# Altium PCB STM32WL_FE.PcbDoc
Units mm, origin at the board's own origin, x right, y up, seen from the top; angles counter-clockwise.
Board outline 90 x 80 mm, 2 copper layers (Top Layer, Bottom Layer); 62 components, 35 nets, 213 pads, 17 vias.
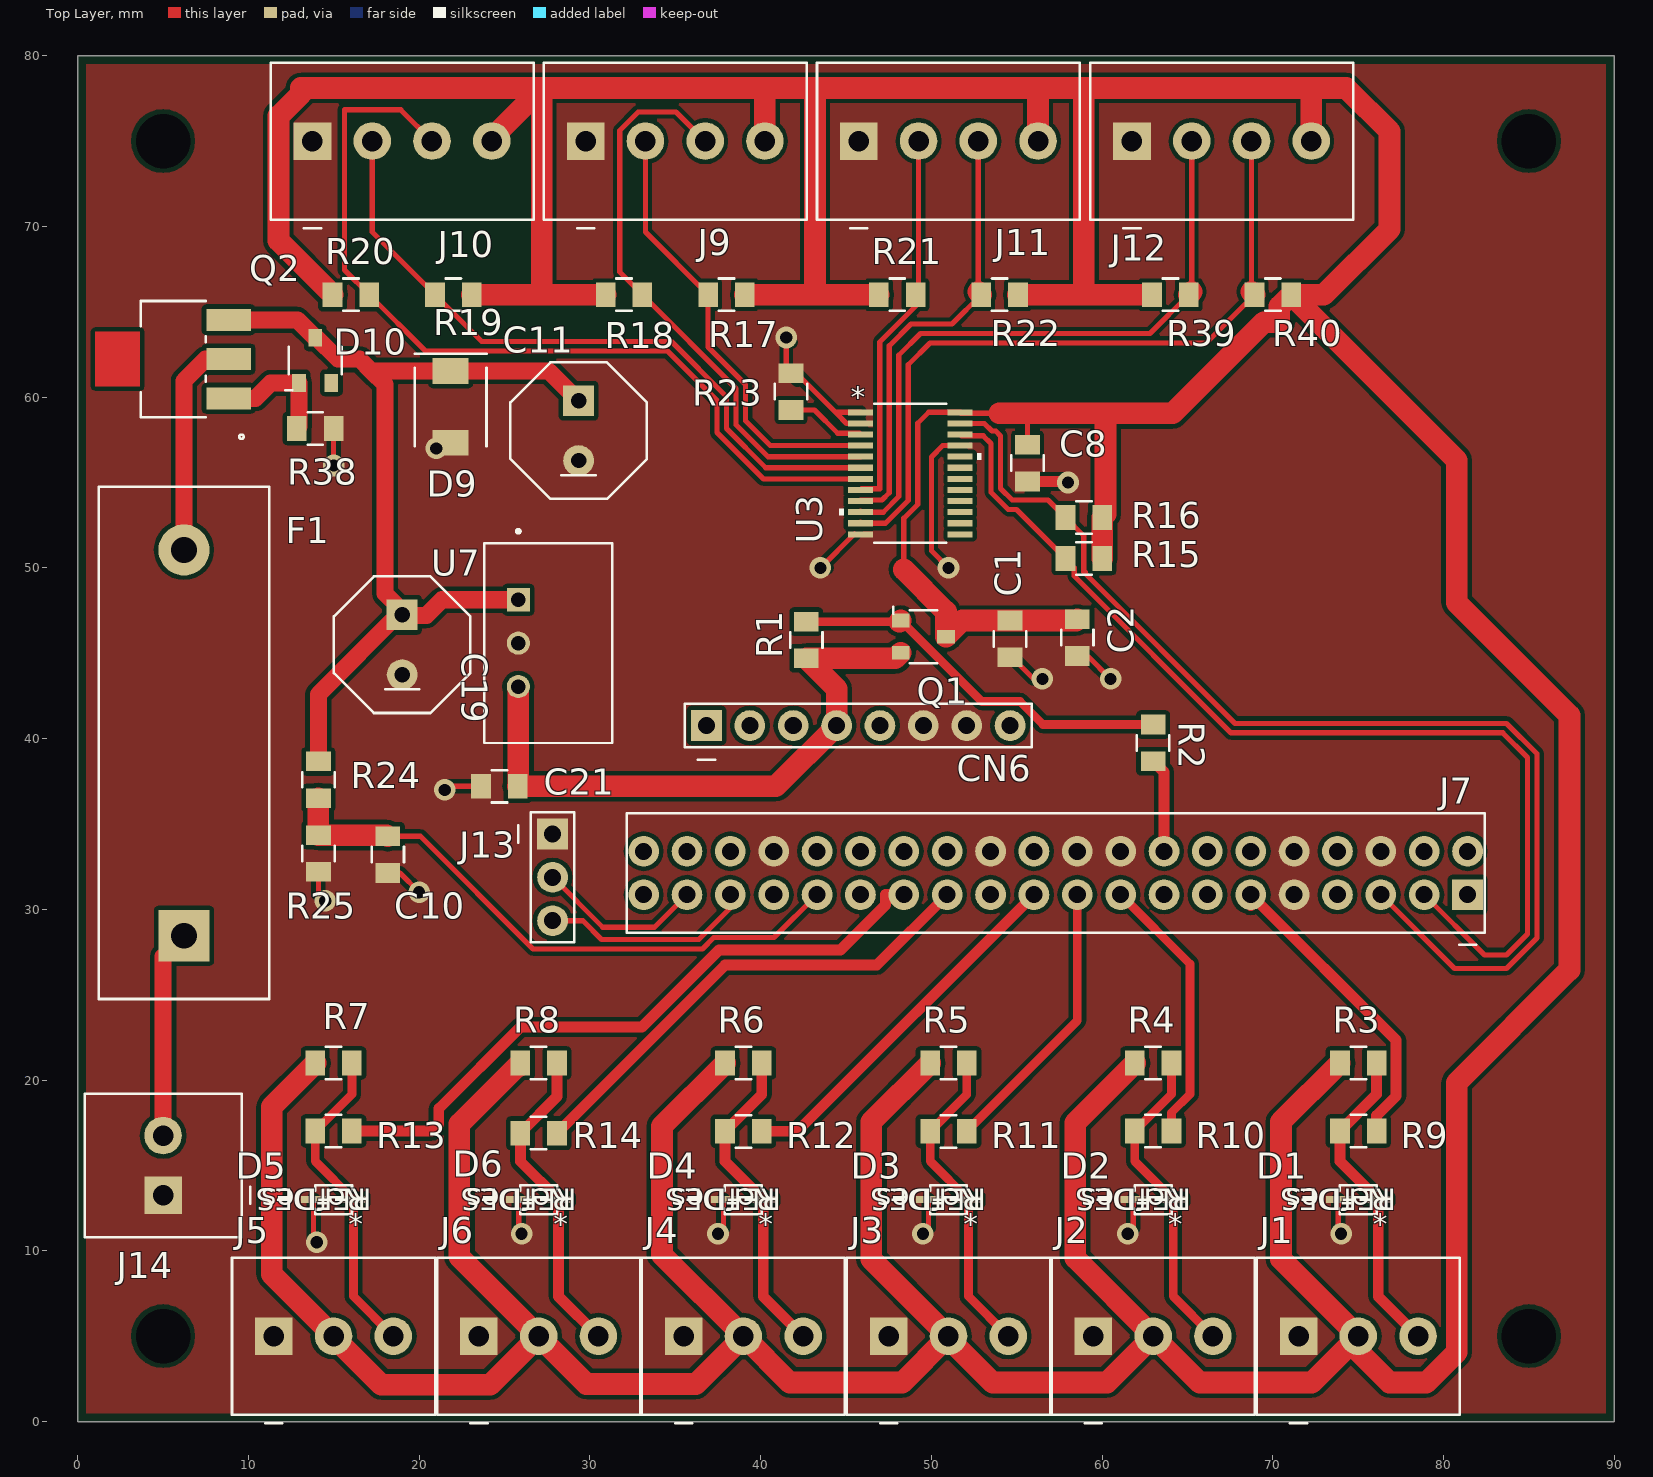
[diagram p0: Top Layer view]
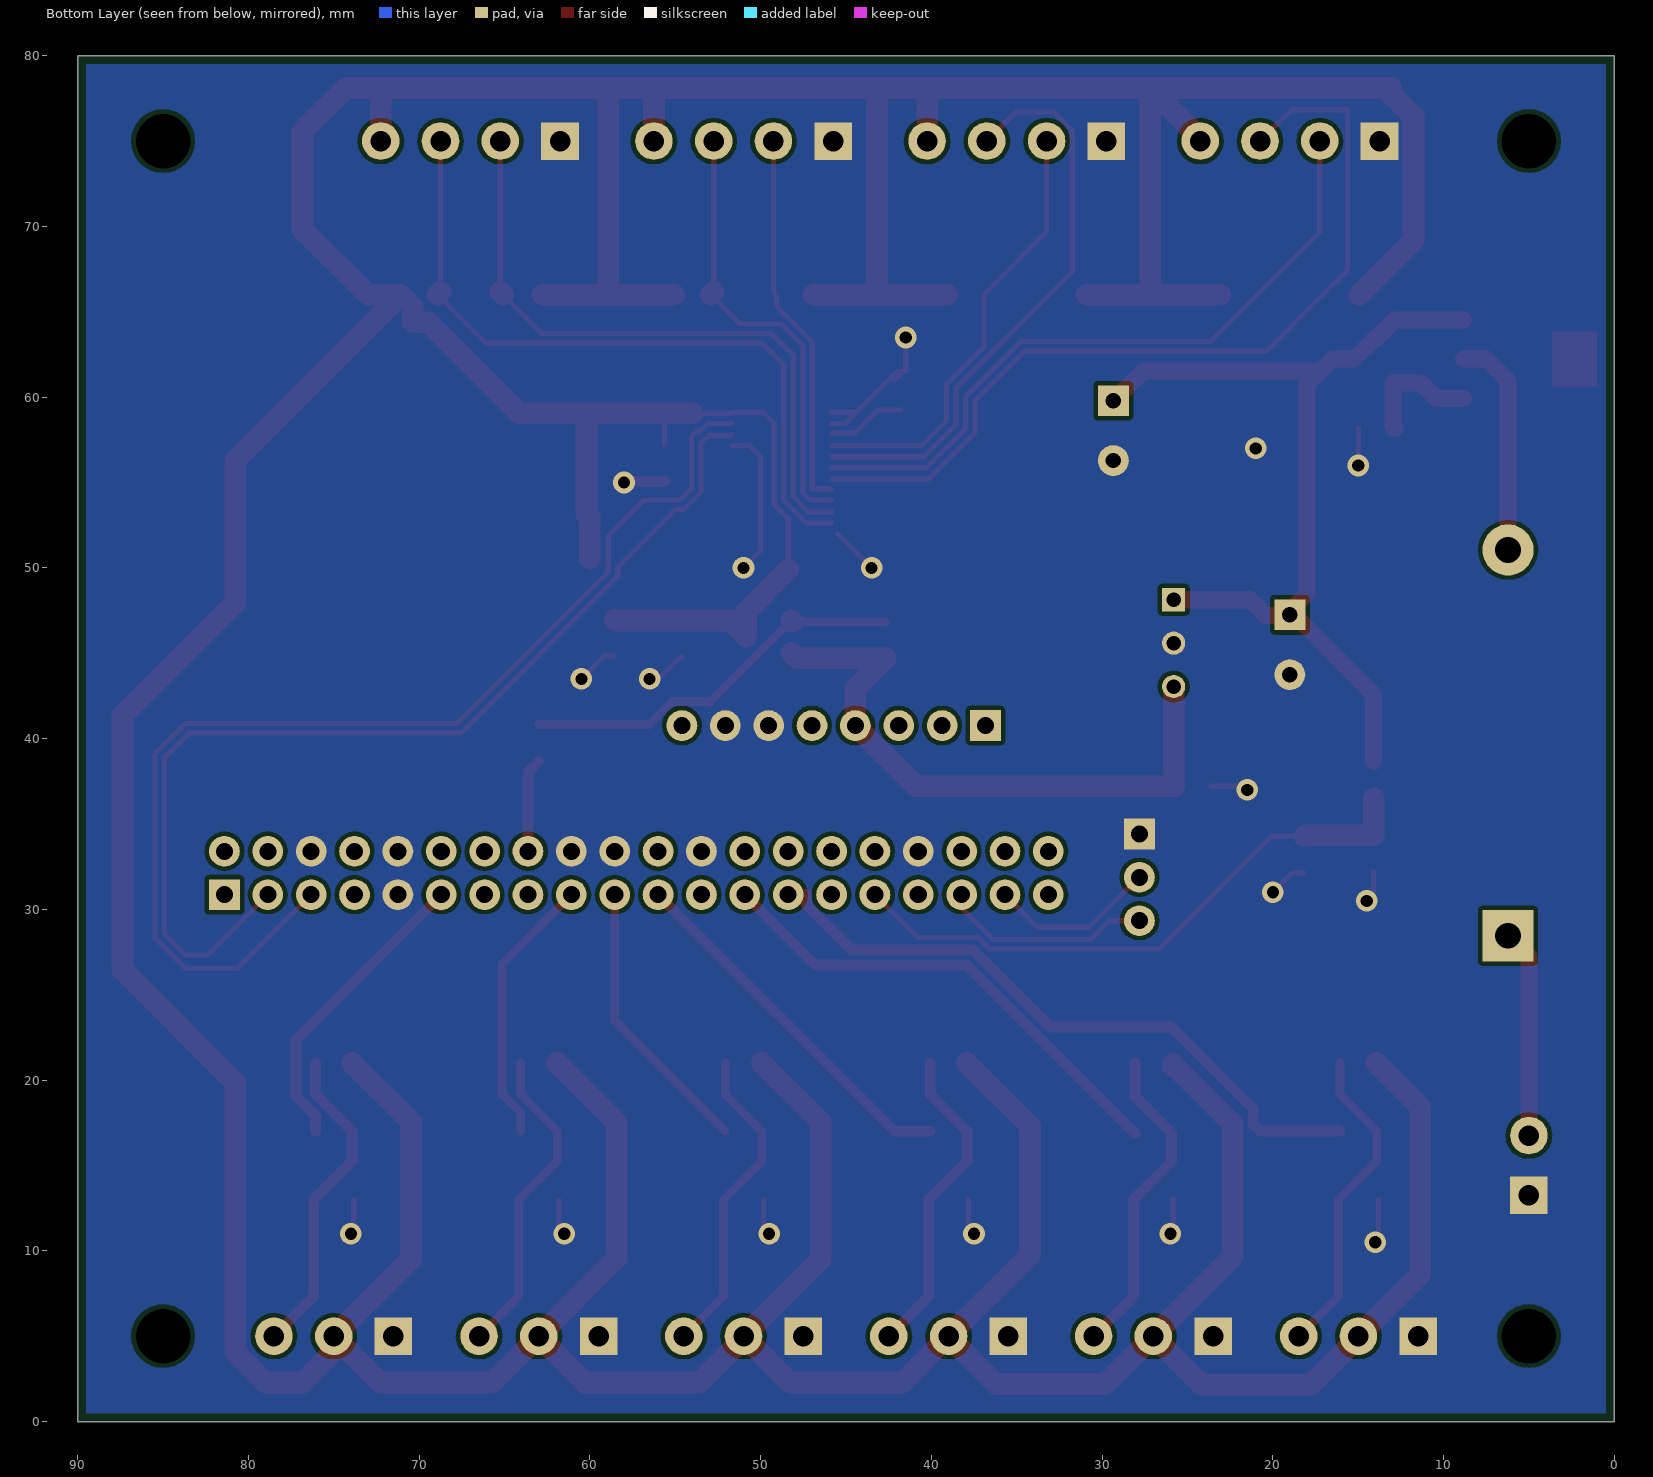
[diagram p1: Bottom Layer view, seen from below]

## Layer stack, top to bottom
Top Solder: solder mask 0.0102, Solder Resist, Dk 3.5
Top Layer: signal copper 0.0356
Dielectric 1: dielectric 0.32, FR-4, Dk 4.8
Bottom Layer: signal copper 0.0356
Bottom Solder: solder mask 0.0102, Solder Resist, Dk 3.5

## Board outline
0,0 0,80 90,80 90,0

## Design rules (kind name [scope] priority, off if disabled: settings)
Clearance [All] p1: gap=0.25 ignorepadtopadclearanceinfootprint=TRUE except(0: Arc-Hole Track-Hole SMDPad-Hole THPad-Hole Via-Hole Fill-Hole Poly-Hole Region-Hole Text-Hole)
HoleSize [All] p1: absolutevalues=TRUE maxlimit=3.5 minlimit=0.025 maxpercent=80.000 minpercent=20.000
PolygonConnect IsVia [All] p1: connectstyle=Direct reliefconductorwidth=0.254 reliefentries=4 polygonreliefangle="90 Angle" airgapwidth=0.254
RoomDefinition I2C-sensors [InComponentClass('I2C-sensors')] p1: confinementstyle=ConfineIn formatcopy=TRUE lockcomponents=FALSE outline 153.543,90.424 353.568,90.424 353.568,108.966 153.543,108.966
RoomDefinition FrontEnd-signals [InComponentClass('FrontEnd-signals')] p2: confinementstyle=ConfineIn formatcopy=TRUE lockcomponents=FALSE outline 153.543,35.814 418.084,35.814 418.084,89.154 153.543,89.154
RoomDefinition Buck-regulator [InComponentClass('Buck-regulator')] p3: confinementstyle=ConfineIn formatcopy=TRUE lockcomponents=FALSE outline 153.543,1.524 304.165,1.524 304.165,34.544 153.543,34.544
RoutingVias [All] p1: holewidth=0.711 width=1.27 viastyle="Through Hole" minholewidth=0.711 minwidth=1.27 maxholewidth=0.711 maxwidth=1.27
SolderMaskExpansion [All] p1: expansion=0.102
Width [All] p1: maxlimit=7.62 minlimit=0.254 preferedwidth=0.635 minimp=50.000000 maximp=50.000000 favimp=50.000000
29 further rules are at their usual default settings.

## Classes and differential pairs
component class I2C-sensors: C8 J9 J10 J11 J12 R15 R16 R17 R18 R19 R20 R21 R22 R23 R39 R40 U3
component class FrontEnd-signals: C1 C2 CN6 D1 D2 D3 D4 D5 D6 J1 J2 J3 J4 J5 J6 J7 J13 Q1 R1 R2 R3 R4 R5 R6 R7 R8 R9 R10 R11 R12 R13 R14
component class Buck-regulator: C10 C11 C19 C21 D9 D10 F1 J14 Q2 R24 R25 R38 U7

## Components (designator, comment, footprint, x,y, rotation, side; value= is the part's Value field where it differs from the comment)
C1 "Cap" CHIP0805-M 54.61,45.847 r90 top value=10uF
C2 "Cap" CHIP0805-M 58.547,45.915 r90 top value=100nF
C8 "100nF" CHIP0805-M 55.626,56.134 r270 top
C10 "" CHIP0805-M 18.161,33.206 r90 top value=100nF
C11 "100 µF ≥63 V" RADIAL-D8-P35 29.337,58.039 r270 top value=100uF
C19 "100 µF / 63 V" RADIAL-D8-P35 19,45.5 r270 top value="100 ?F / 63 V"
C21 "22 µF / 16 V" CHIP0805-M 24.697,37.211 r0 top value="22uF 16v"
CN6 "Header 8" HDR1X8-P254 45.72,40.767 r0 top
D1 "CDSOD323-T05LC" CDSOD323_BRN-M 75.006,13 r180 top locked
D2 "CDSOD323-T05LC" CDSOD323_BRN-M 62.992,13 r180 top locked
D3 "CDSOD323-T05LC" CDSOD323_BRN-M 51.003,13 r180 top
D4 "CDSOD323-T05LC" CDSOD323_BRN-M 38.989,13 r180 top
D5 "CDSOD323-T05LC" CDSOD323_BRN-M 14.986,13 r180 top
D6 "CDSOD323-T05LC" CDSOD323_BRN-M 27,13 r180 top
D9 "SMBJ33A" SMB-DO214AA-M 21.844,59.436 r270 top
D10 "Diode-NC_pin" SOT23-3-M 13.909,62.158 r0 top value=Diode
F1 "Fuse 2A" FUSEHOLDER-5X20-P226 6.223,39.751 r90 top
J1 "P0" PHX-MC15-3-G-35 75.006,5 r0 top locked
J2 "P1" PHX-MC15-3-G-35 62.992,5 r0 top locked
J3 "P2" PHX-MC15-3-G-35 51.003,5 r0 top locked
J4 "P3" PHX-MC15-3-G-35 38.989,5 r0 top locked
J5 "P4" PHX-MC15-3-G-35 14.986,5 r0 top locked
J6 "P5" PHX-MC15-3-G-35 27,5 r0 top locked
J7 "CN10" HDR2X20-BOX 57.277,32.131 r180 top
J9 "SHT45" PHX-MC15-4-G-35 35,75 r0 top
J10 "SHT45" PHX-MC15-4-G-35 19,75 r0 top locked
J11 "SHT45" PHX-MC15-4-G-35 51,75 r0 top locked
J12 "SCD41" PHX-MC15-4-G-35 67,75 r0 top locked
J13 "USB-serial adapter" HDR1X3-P254 27.813,31.877 r270 top
J14 "24v" PHX-MC15-2-G-35 5,15 r90 top locked
Q1 "AO3401A" SOT23-3-M 49.53,45.974 r270 top
Q2 "DMP6023LE-13" DMP6023LE-13_DIO-M 5.588,62.23 r90 top
R1 "pullup" CHIP0805-M 42.672,45.779 r270 top value=100K
R2 "pullup" CHIP0805-M 62.992,39.751 r90 top value=100R
R3 "pullup" CHIP0805-M 75.006,21 r0 top locked value=4.7K
R4 "pullup" CHIP0805-M 62.992,21 r0 top locked value=4.7K
R5 "pullup" CHIP0805-M 51.003,21 r0 top locked value=4.7K
R6 "pullup" CHIP0805-M 38.989,21 r0 top locked value=4.7K
R7 "pullup" CHIP0805-M 14.986,21 r0 top locked value=4.7K
R8 "pullup" CHIP0805-M 27,21 r0 top locked value=4.7K
R9 "100R" CHIP0805-M 75.006,17.018 r180 top
R10 "100R" CHIP0805-M 62.992,17.018 r180 top
R11 "100R" CHIP0805-M 51.003,17 r180 top
R12 "100R" CHIP0805-M 38.989,17 r180 top
R13 "100R" CHIP0805-M 14.986,17.018 r180 top
R14 "100R" CHIP0805-M 27,16.891 r180 top
R15 "pullup" CHIP0805-M 58.928,50.546 r180 top value=4.7K
R16 "pullup" CHIP0805-M 58.928,52.959 r180 top value=4.7K
R17 "pullup" CHIP0805-M 38,66 r0 top value=2.2K
R18 "pullup" CHIP0805-M 32,66 r180 top value=2.2K
R19 "pullup" CHIP0805-M 22,66 r0 top value=2.2K
R20 "pullup" CHIP0805-M 16,66 r180 top value=2.2K
R21 "pullup" CHIP0805-M 48,66 r180 top value=2.2K
R22 "pullup" CHIP0805-M 54,66 r0 top locked value=2.2K
R23 "220R" CHIP0805-M 41.783,60.325 r270 top value=10K
R24 "pullup" CHIP0805-M 14.097,37.592 r90 top value=300k
R25 "pullup" CHIP0805-M 14.097,33.274 r90 top value=30k
R38 "pullup" CHIP0805-M 13.911,58.166 r0 top value=470k
R39 "pullup" CHIP0805-M 64,66 r180 top locked value=2.2K
R40 "pullup" CHIP0805-M 70,66 r0 top locked value=2.2K
U3 "TCA9548APWR" PW24_TEX 48.768,55.54 r0 top
U7 "TSR_1-2433" CONV_TSR_1-2433 27.559,45.593 r270 top

## Footprints (in the part's own frame and the unit in brackets; to place one, negate y for a bottom-side part, rotate by r counter-clockwise, add the part's x,y. Pads: shape width x height; smd on the part's side, far side on the other; paste and mask are expansions set on the pad)
CDSOD323_BRN-M [mil]
  rect 58x16 smd paste+0 mask+0: 1(-46,0) 2(46,0)
  silkscreen extent -43,-34 43,34, body extent -53,-29 53,29, height 45
CHIP0805-M [mm] "0805 chip R/C, hand-solder land (Vishay 28950 IPC-7351 + 0.25 mm)"
  rect 1.15x1.45 smd: 1(-1.075,0) 2(1.075,0)
  silkscreen extent -0.45,-0.95 0.45,0.95
CONV_TSR_1-2433 [mm]
  rect 1.358x1.358 hole 0.85: 1(-2.54,-1.75)
  round 1.358 hole 0.85: 2(0,-1.75) 3(2.54,-1.75)
  silkscreen extent -6.65,-3.75 5.85,3.75, body extent -5.85,-3.75 5.85,3.75, height 4.8
DMP6023LE-13_DIO-M [mil]
  rect 51x103 smd paste+0 mask+0: 1(-90.55,-127.98) 2(0,-127.98) 3(90.55,-127.98)
  Top Layer region: 63,76.48 63,179.48 -63,179.48 -63,76.48
  silkscreen extent -184,-162 134,75, body extent -129,-157 129,157, height 65
FUSEHOLDER-5X20-P226 [mm] "Fuse holder, 5x20 mm cartridge, covered, 22.6 mm pitch. Holes oversized on purpose; body outline provisional"
  rect 3x3 hole 1.5: 1(-11.3,0)
  round 3 hole 1.5: 2(11.3,0)
  silkscreen extent -15,-5 15,5
HDR1X3-P254 [mm] "Pin header 1x3, 2.54 mm. J13 debug UART"
  rect 1.8x1.8 hole 1: 1(-2.54,0)
  round 1.8 hole 1: 2(0,0) 3(2.54,0)
  silkscreen extent -3.81,-2 3.81,1.27
HDR1X8-P254 [mm] "Pin header 1x8, 2.54 mm. CN6 power tap - clip CN6-1 and plug hole 1 (section 1)"
  rect 1.8x1.8 hole 1: 1(-8.89,0)
  round 1.8 hole 1: 2(-6.35,0) 3(-3.81,0) 4(-1.27,0) 5(1.27,0) 6(3.81,0) 7(6.35,0) 8(8.89,0)
  silkscreen extent -10.16,-2 10.16,1.27
HDR2X20-BOX [mm] "Box header 2x20, 2.54 mm, shrouded. Pins 39/40 unconnected. Shroud outline provisional"
  rect 1.8x1.8 hole 1: 1(-24.13,1.27)
  round 1.8 hole 1: 2(-24.13,-1.27) 3(-21.59,1.27) 4(-21.59,-1.27) 5(-19.05,1.27) 6(-19.05,-1.27) 7(-16.51,1.27) 8(-16.51,-1.27) 9(-13.97,1.27) 10(-13.97,-1.27) 11(-11.43,1.27) 12(-11.43,-1.27) 13(-8.89,1.27) 14(-8.89,-1.27) 15(-6.35,1.27) 16(-6.35,-1.27) 17(-3.81,1.27) 18(-3.81,-1.27) 19(-1.27,1.27) 20(-1.27,-1.27) 21(1.27,1.27) 22(1.27,-1.27) 23(3.81,1.27) 24(3.81,-1.27) 25(6.35,1.27) 26(6.35,-1.27) 27(8.89,1.27) 28(8.89,-1.27) 29(11.43,1.27) 30(11.43,-1.27) 31(13.97,1.27) 32(13.97,-1.27) 33(16.51,1.27) 34(16.51,-1.27) 35(19.05,1.27) 36(19.05,-1.27) 37(21.59,1.27) 38(21.59,-1.27) 39(24.13,1.27) 40(24.13,-1.27)
  silkscreen extent -25.13,-3.5 25.13,4.2
PHX-MC15-2-G-35 [mm] "Phoenix MC 1,5/n-G-3,5 header, 3.5 mm pitch, 1.2 mm holes (datasheet 1844223); 2.2 mm pads chosen"
  rect 2.2x2.2 hole 1.2: 1(-1.75,0)
  round 2.2 hole 1.2: 2(1.75,0)
  silkscreen extent -4.2,-5.1 4.2,4.6
PHX-MC15-3-G-35 [mm] "Phoenix MC 1,5/n-G-3,5 header, 3.5 mm pitch, 1.2 mm holes (datasheet 1844223); 2.2 mm pads chosen"
  rect 2.2x2.2 hole 1.2: 1(-3.5,0)
  round 2.2 hole 1.2: 2(0,0) 3(3.5,0)
  silkscreen extent -5.95,-5.1 5.95,4.6
PHX-MC15-4-G-35 [mm] "Phoenix MC 1,5/n-G-3,5 header, 3.5 mm pitch, 1.2 mm holes (datasheet 1844223); 2.2 mm pads chosen"
  rect 2.2x2.2 hole 1.2: 1(-5.25,0)
  round 2.2 hole 1.2: 2(-1.75,0) 3(1.75,0) 4(5.25,0)
  silkscreen extent -7.7,-5.1 7.7,4.6
PW24_TEX [mm]
  rect 1.462x0.355 smd paste+0 mask+0: 1(-2.921,3.575) 2(-2.921,2.925) 3(-2.921,2.275) 4(-2.921,1.625) 5(-2.921,0.975) 6(-2.921,0.325) 7(-2.921,-0.325) 8(-2.921,-0.975) 9(-2.921,-1.625) 10(-2.921,-2.275) 11(-2.921,-2.925) 12(-2.921,-3.575) 13(2.921,-3.575) 14(2.921,-2.925) 15(2.921,-2.275) 16(2.921,-1.625) 17(2.921,-0.975) 18(2.921,-0.325) 19(2.921,0.325) 20(2.921,0.975) 21(2.921,1.625) 22(2.921,2.275) 23(2.921,2.925) 24(2.921,3.575)
  silkscreen extent -4.16,-4.08 4.16,4.08, body extent -3.3,-3.95 3.3,3.95, height 1.2
RADIAL-D8-P35 [mm] "Radial electrolytic, 8 mm can, 3.5 mm lead pitch (Nichicon UVR1J101MPD). Pad 1 = +"
  rect 1.8x1.8 hole 0.9: 1(-1.75,0)
  round 1.8 hole 0.9: 2(1.75,0)
  silkscreen extent -4,-4 4,4
SMB-DO214AA-M [mm] "SMB/DO-214AA hand-solder land (Bourns SMBJ recommended + 0.25 mm). Pad 1 = cathode"
  rect 1.52x2.1 smd: 1(-2.105,0) 2(2.105,0)
  silkscreen extent -3.1,-2.1 2.3,2.1
SOT23-3-M [mm] "SOT-23, hand-solder land (AOS PO-00001 rev N + 0.25 mm)"
  rect 0.8x1.05 smd: 1(-0.95,-1.325) 2(0.95,-1.325) 3(0,1.325)
  silkscreen extent -1.75,-1.75 1.55,0.8

## Part data
C1 C2: "Capacitor", LatestRevisionDate=17-Jul-2002, LatestRevisionNote="Re-released for DXP Platform.", PackageDescription="Radial Cap, Thru-Hole; 2 Leads; 0.3 in Pin Spacing", PackageReference=RAD-0.3, Published=8-Jun-2000, Publisher="Altium Limited"
C8 C10 C11 C19 C21: library part Cap, "Capacitor", LatestRevisionDate=17-Jul-2002, LatestRevisionNote="Re-released for DXP Platform.", PackageDescription="Radial Cap, Thru-Hole; 2 Leads; 0.3 in Pin Spacing", PackageReference=RAD-0.3, Published=8-Jun-2000, Publisher="Altium Limited"
CN6: "Header, 8-Pin", LatestRevisionDate=17-Jul-2002, LatestRevisionNote="Re-released for DXP Platform.", Publisher="Altium Limited"
D1 D2 D3 D4 D5 D6: "A 05V, 350W, bi-directional, low capacitance, SOD323 pkg TVS Diode", Package="SOD-323 Bourns", Check_prices=https://www.snapeda.com/parts/CDSOD323-T05LC/Bourns/view-part/?ref=eda, MF=Bourns, MP=CDSOD323-T05LC, SnapEDA_Link=https://www.snapeda.com/parts/CDSOD323-T05LC/Bourns/view-part/?ref=snap
D9: "Description", Manufacturer_Name="Bourns Electronics", Copyright="Copyright (C) 2026 Ultra Librarian. All rights reserved.", Manufacturer_Part_Number=SMBJ33A
F1: library part "Fuse 1", "Fuse", LatestRevisionDate=17-Jul-2002, LatestRevisionNote="Re-released for DXP Platform.", PackageDescription="Thru-Hole; 2 Leads", PackageReference=PIN-W2/E2.8, Published=8-Jun-2000, Publisher="Altium Limited"
J1 J2 J3 J4 J5 J6 J13: library part "Header 3", "Header, 3-Pin", LatestRevisionDate=17-Jul-2002, LatestRevisionNote="Re-released for DXP Platform.", Publisher="Altium Limited"
J7: library part "Header 20X2", "Header, 20-Pin, Dual row", LatestRevisionDate=17-Jul-2002, LatestRevisionNote="Re-released for DXP Platform.", Publisher="Altium Limited"
J9 J10 J11 J12: library part "Header 4", "Header, 4-Pin", LatestRevisionDate=17-Jul-2002, LatestRevisionNote="Re-released for DXP Platform.", Publisher="Altium Limited"
J14: library part "Header 2", "Header, 2-Pin", LatestRevisionDate=17-Jul-2002, LatestRevisionNote="Re-released for DXP Platform.", Publisher="Altium Limited"
Q1: "Description", Manufacturer_Name="Alpha and Omega Semiconductor", Copyright="Copyright (C) 2026 Ultra Librarian. All rights reserved.", Manufacturer_Part_Number=AO3401A, RefDes=RefDes, Type=Type
Q2: "Description", Manufacturer_Name="Diodes Inc", Copyright="Copyright (C) 2026 Ultra Librarian. All rights reserved.", Manufacturer_Part_Number=DMP6023LE-13, RefDes=RefDes, Type=Type
R1 R2 R3 R4 R5 R6 R7 R8 R9 R10 R11 R12 R13 R14 R15 R16 R17 R18 R19 R20 R21 R22 R23 R24 R25 R38 R39 R40: library part Res1, "Resistor", LatestRevisionDate=17-Jul-2002, LatestRevisionNote="Re-released for DXP Platform.", PackageDescription="Axial Device, Thru-Hole; 2 Leads; 0.3 in Pin Spacing", PackageReference=AXIAL-0.3, Published=8-Jun-2000, Publisher="Altium Limited"
U3: "8-channel 1.65- to 5.5-V I2C/SMBus switch with reset & voltage translation 24-TSSOP -40 to 85", Manufacturer_Name="Texas Instruments", Copyright="Copyright (C) 2025 Ultra Librarian. All rights reserved.", Manufacturer_Part_Number=TCA9548APWR, RefDes=RefDes, Type=Type
U7: "1 Amp POL switching regulator, 4.6 to -36 VDC input, pos.-pos. circuit, LM78 compatible, SIP-3", Package="SIP-3 Traco Power", Availability="In Stock", Check_prices=https://www.snapeda.com/parts/TSR%201-2433/Traco%20Power/view-part/6027450/?ref=eda, MF="Traco Power", MP="TSR 1-2433", Price=None, Purchase-URL="https://pricing.snapeda.com/search/part/TSR 1-2433/?ref=eda", SnapEDA_Link=https://www.snapeda.com/parts/TSR%201-2433/Traco%20Power/view-part/6027450/?ref=snap
D10: Datasheet=https://diotec.com/de/produktliste/D.html, ki_description="Diode with NC pin", ki_keywords="Doide NC pin", Reference=D

## Free pads (board coordinates)
  round 1.524 hole 3.2 unplated: 4(5,5) 5(85,5) 6(5,75) 7(85,75)

## Via types
v1: diameter 1.27, hole 0.711, Top Layer to Bottom Layer, 17 vias

## Nets (pads, with @x,y where several pads share a name; then routed paths per layer and width w, separated by ;. In a path a pad name is that pad's centre, name@x,y a point inside that pad or via, vN(x,y) a via of type N, cw(c..) or ccw(c..) an arc to the next point about the centre after c; other vN are vias at no path point)
24V_PROT: C11.1 C19.1 D9.1 D10.3 Q2.3 R24.2 U7.1 | length 55.6
  Top Layer w1: Q2.3 12.862,64.53 D10.3 13.987,63.483 15.24,62.23 16.51,62.23 17.199,61.541 ; R24.2 14.097,42.597 C19.1@19,47.5 ; U7.1 21.336,48.133 20.419,47.216 19,47.216 C19.1 C19.1@19,47.5 ; C11.1 27.585,61.541 D9.1 17.199,61.541 ; 17.199,61.541 18,60.74 18,48.5 C19.1@19,47.5
24V_RAW: F1.2 Q2.2 | length 13.1
  Top Layer w1: F1.2 6.223,60.96 7.493,62.23 Q2.2
DBG_RX: J7.37 J13.2 | length 10.2
  Top Layer w0.305: J13.2 27.836,31.877 30.757,28.956 33.782,28.956 J7.37
  Top Layer w0.635: J7.37@35.433,31.115 J7.37
DBG_TX: J7.35 J13.3 | length 12.4
  Top Layer w0.305: J13.3 29.591,29.337 30.687,28.241 36.371,28.241 38.227,30.097 J7.35
DQ_P0: J7.11 R9.1 | length 18.5
  Top Layer w0.635: J7.11@68.707,30.226 J7.11 77.224,22.344 77.224,19.059 76.081,17.916 R9.1
DQ_P1: J7.17 R10.1 | length 16
  Top Layer w0.508: J7.17 65.146,26.802 65.146,19.175 64.067,18.096 R10.1
DQ_P2: J7.19 R11.1 | length 16.5
  Top Layer w0.508: R11.1 58.547,23.469 J7.19
DQ_P3: J7.21 R12.1 | length 21.7
  Top Layer w0.635: R12.1 42.146,17 J7.21
DQ_P4: J7.27 R13.1 | length 38.9
  Top Layer w0.635: R13.1 20.74,17.018 21.15,17.427 21.15,18.327 25.937,23.114 33.047,23.114 37.556,27.624 44.685,27.624 47.315,30.253 47.315,30.861 J7.27
DQ_P5: J7.25 R14.1 | length 28.6
  Top Layer w0.635: R14.1 37.923,26.739 46.805,26.739 J7.25
GND: C1.1 C2.1 C8.2 C10.1 C11.2 C19.2 C21.1 CN6.6 CN6.7 D1.2 D2.2 D3.2 D4.2 D5.2 D6.2 D9.2 J1.1 J2.1 J3.1 J4.1 J5.1 J6.1 J7.6 J7.9 J7.10 J7.18 J7.20 J7.24 J7.34 J9.1 J10.1 J11.1 J12.1 J13.1 J14.1 R23.1 R25.1 R38.2 U3.1 U3.2 U3.12 U3.21 U7.2 | length 51
  Top Layer w0.305: D5.2 13.818,10.682 v1(14,10.5) ; R25.1 14.097,30.903 v1(14.5,30.5) ; R38.2 14.986,56.014 v1(15,56) ; C10.1 18.869,32.131 v1(20,31) ; v1(21.5,37) 21.711,37.211 C21.1 ; D6.2 25.832,11.168 v1(26,11) ; v1(37.5,11) 37.821,11.321 D4.2 ; R23.1 R23.1@42.183,61 ; v1@41.783,63.217 v1(41.5,63.5) 41.5,61.5 42,61.5 44.385,59.115 U3.1 ; v1@43.882,50 v1(43.5,50) U3.12@45.5,52 ; 44.5,59 45.035,58.465 U3.2 ; v1(49.5,11) 49.835,11.335 D3.2 ; v1(51,50) 50,51 50,56.5 50.665,57.165 U3.21 ; C1.1 54.728,44.772 56,43.5 v1(56.5,43.5) ; C2.1 59.16,44.84 v1(60.5,43.5) ; v1(61.5,11) 61.824,11.324 D2.2 ; D1.2 73.838,11.162 v1(74,11)
  Top Layer w0.635: C8.2 57.941,55.059 v1(58,55)
  other v1: 21,57
I2C_SCL: J7.3 R15.2 U3.22 | length 61.4
  Top Layer w0.305: U3.22 51.759,57.745 53.033,57.745 53.5,57.278 53.5,54.427 54.507,53.42 54.979,53.42 R15.2 58.373,50.026 58.373,49.522 67.556,40.339 83.463,40.339 84.916,38.886 84.916,28.551 83.693,27.328 82.4,27.328 J7.3
I2C_SDA: J7.5 R16.2 U3.23 | length 67.4
  Top Layer w0.305: U3.23 53.098,58.465 53.545,58.018 53.767,58.018 54.055,57.73 54.055,54.657 54.737,53.975 56.837,53.975 R16.2 58.928,51.884 58.928,49.752 59.026,49.752 59.026,49.654 67.786,40.894 83.693,40.894 85.471,39.116 85.471,28.321 83.693,26.543 80.645,26.543 J7.5
NetD1_1: D1.1 J1.3 R3.2 R9.2 | length 18.8
  Top Layer w0.635: R3.2 76.081,19.168 R9.2 73.931,15.243 D1.1 76.175,7.332 J1.3
NetD2_1: D2.1 J2.3 R4.2 R10.2 | length 18.8
  Top Layer w0.508: R4.2 64.067,19.168 R10.2 61.917,15.243 D2.1 64.16,7.332 J2.3
NetD3_1: D3.1 J3.3 R5.2 R11.2 | length 18.8
  Top Layer w0.508: R5.2 52.078,19.15 R11.2 49.928,15.243 D3.1 52.172,7.332 J3.3
NetD4_1: D4.1 J4.3 R6.2 R12.2 | length 18.8
  Top Layer w0.635: R6.2 40.064,19.15 R12.2 37.914,15.243 D4.1 40.157,7.332 J4.3
NetD5_1: D5.1 J5.3 R7.2 R13.2 | length 18.8
  Top Layer w0.508: R7.2 16.061,19.168 R13.2 13.911,15.243 D5.1 16.154,7.332 J5.3
NetD6_1: D6.1 J6.3 R8.2 R14.2 | length 18.8
  Top Layer w0.635: R8.2 28.075,19.041 R14.2 25.925,15.243 D6.1 28.169,7.332 J6.3
NetD10_1: D10.1 Q2.1 R38.1 | length 7.2
  Top Layer w1: Q2.1 10.4,59.93 11.303,60.833 D10.1 12.959,58.289 R38.1
NetF1_1: F1.1 J14.2 | length 12.2
  Top Layer w1: J14.2 5,27.228 F1.1
NetJ9_2: J9.2 R17.1 U3.4 | length 26.1
  Top Layer w0.305: J9.2 33.25,69.675 R17.1 36.925,62.935 39.114,60.746 39.114,58.617 40.566,57.165 U3.4
NetJ9_3: J9.3 R18.1 U3.5 | length 34.3
  Top Layer w0.305: J9.3 35.042,76.708 32.833,76.708 31.748,75.622 31.748,67.327 R18.1 38.559,60.516 38.559,58.387 40.431,56.515 U3.5
NetJ10_2: J10.2 R19.1 U3.6 | length 40.7
  Top Layer w0.305: J10.2 17.25,69.675 R19.1 23.667,63.258 34.772,63.258 38.004,60.026 38.004,58.157 40.297,55.865 U3.6
NetJ10_3: J10.3 R20.1 U3.7 | length 51.7
  Top Layer w0.305: J10.3 18.915,76.835 15.621,76.835 15.621,67.454 R20.1 20.372,62.703 34.543,62.703 37.449,59.797 37.449,57.928 40.162,55.215 U3.7
NetJ11_2: J11.2 R21.1 U3.8 | length 22.5
  Top Layer w0.305: U3.8 45.917,54.635 46.98,54.635 46.98,63.236 49.075,65.331 R21.1 49.25,66.175 J11.2
NetJ11_3: J11.3 R22.1 U3.9 | length 26.3
  Top Layer w0.305: U3.9@45.847,53.985 U3.9 45.917,53.985 47.115,53.985 47.535,54.405 47.535,63.007 48.812,64.284 51.209,64.284 R22.1 ; R22.1@52.75,66.175 J11.3
  Top Layer w1.27: R22.1@52.75,66.175 R22.1
NetJ12_2: J12.2 R39.1 U3.10 | length 38.5
  Top Layer w0.305: U3.10@45.847,53.335 U3.10 47.179,53.265 48.09,54.176 48.09,62.452 49.367,63.729 62.804,63.729 R39.1 ; R39.1@65.25,66.175 J12.2
  Top Layer w1.27: R39.1 R39.1@65.25,66.175
NetJ12_3: J12.3 R40.1 U3.11 | length 42.4
  Top Layer w0.305: U3.11@45.847,52.685 U3.11 47.314,52.615 48.645,53.946 48.645,61.897 49.922,63.174 66.099,63.174 R40.1 ; R40.1@68.75,66.175 J12.3
  Top Layer w1.27: R40.1@68.75,66.175 R40.1
NetQ1_1: Q1.1 R1.1 R2.2 | length 22.9
  Top Layer w0.508: R1.1 Q1.1@48.135,46.854 ; Q1.1 52.958,42.171 55.192,42.171 56.537,40.826 R2.2
  Top Layer w1.27: Q1.1@48.135,46.854 Q1.1
NetR23_2: R23.2 U3.3 | length 4.7
  Top Layer w0.305: R23.2 43.148,59.25 44.513,57.885 45.777,57.885 U3.3
SENS_GATE: J7.16 R2.1 | length 5.5
  Top Layer w0.635: R2.1 63.627,38.041 J7.16
V3V3_MCU: C21.2 CN6.4 Q1.2 R1.2 U7.3 | length 36.3
  Top Layer w1.27: U7.3 25.809,37.248 C21.2 40.894,37.211 CN6.4 44.45,42.926 R1.2 47.885,44.704 Q1.2
VBAT_SENSE: C10.2 J7.31 R24.1 R25.2 | length 35.5
  Top Layer w0.305: C10.2 20.075,34.281 26.67,27.686 36.601,27.686 37.258,28.343 40.789,28.343 J7.31
  Top Layer w1.27: R24.1 R25.2 18.093,34.349 C10.2
VSENS: C1.2 C2.2 C8.1 J1.2 J2.2 J3.2 J4.2 J5.2 J6.2 J9.4 J10.4 J11.4 J12.4 Q1.3 R3.1 R4.1 R5.1 R6.1 R7.1 R8.1 R15.1 R16.1 R17.2 R18.2 R19.2 R20.2 R21.2 R22.2 R39.2 R40.2 U3.24 | length 489.9
  Top Layer w0.305: 48.387,49.911 48.387,52.903 49.2,53.716 49.2,58.471 49.844,59.115 U3.24 51.749,59.055 53.975,59.055 ; C8.1 55.626,59.055
  Top Layer w1.27: R7.1@13.925,21 11.364,18.439 11.364,8.636 15,5 15,4.939 17.78,2.159 24.159,2.159 J6.2 ; R20.2 11.765,69.16 11.765,76.467 13.081,77.783 13.081,78.105 27.178,78.105 ; R19.2 27.305,66 ; J10.4 24.25,75.177 27.178,78.105 ; R8.1@25.865,20.828 25.865,20.94 22.352,17.427 22.352,9.648 J6.2 ; R18.2 27.305,66 ; R6.1@37.925,21 34.221,17.296 34.221,9.779 J4.2@39,5 ; R17.2 43.18,66 ; J9.4 40.25,78.096 40.259,78.105 ; R21.2 43.18,66 ; 48.387,49.911 50.855,47.443 Q1.3 51.803,46.922 C1.2 58.479,46.922 C2.2 ; R5.1@49.925,21 46.482,17.557 46.482,9.518 J3.2@51,5 ; 53.975,59.055 55.626,59.055 60.198,59.055 ; R22.2 59.055,66 ; J11.4 56.25,78.094 56.261,78.105 ; R15.1 R16.1 60.198,53.154 60.198,59.055 ; R4.1@61.925,21 58.42,17.495 58.42,9.58 J2.2@63,5 ; R39.2@62.781,66 59.055,66 ; J12.4 72.25,77.991 72.136,78.105 ; R3.1@73.925,21 70.475,17.55 70.475,9.525 J1.2@75,5 ; J6.2 29.805,2.195 36.195,2.195 J4.2@39,5 ; 27.178,78.105 40.259,78.105 ; 27.178,78.105 27.178,66.127 27.305,66 ; J4.2@39,5 41.714,2.286 48.286,2.286 J3.2@51,5 ; 40.259,78.105 43.18,78.105 ; 43.18,66 43.18,78.105 ; 43.18,78.105 56.261,78.105 ; J3.2@51,5 51,4.88 53.594,2.286 60.286,2.286 J2.2@63,5 ; 56.261,78.105 58.928,78.105 ; 58.928,78.105 72.136,78.105 ; 58.928,78.105 58.928,66.127 59.055,66 ; 60.198,59.055 64.13,59.055 69.465,64.39 70.385,64.39 70.385,65.31 R40.2 ; J2.2@63,5 65.714,2.286 72.286,2.286 J1.2@75,5 ; R40.2 80.772,56.303 80.772,47.966 87.372,41.366 87.372,26.452 80.772,19.852 80.772,4.064 78.994,2.286 76.835,2.286 75,4.121 J1.2@75,5 ; R40.2 72.985,66 76.835,69.85 76.835,75.565 74.295,78.105 72.136,78.105
pads on no net: CN6.1 CN6.2 CN6.3 CN6.5 CN6.8 D10.2 J7.1 J7.2 J7.4 J7.7 J7.8 J7.12 J7.13 J7.14 J7.15 J7.22 J7.23 J7.26 J7.28 J7.29 J7.30 J7.32 J7.33 J7.36 J7.38 J7.39 J7.40 U3.13 U3.14 U3.15 U3.16 U3.17 U3.18 U3.19 U3.20

## Polygon pours and split planes (outlines as drawn)
GND on Bottom Layer "Top Layer-No Net" (solid, remove dead copper, pour order 16): 0.5,0.5 89.5,0.5 89.5,79.5 0.5,79.5
GND on Top Layer "Top Layer-No Net" (solid, remove dead copper, pour order 18): 0.5,0.5 89.5,0.5 89.5,79.5 0.5,79.5

## Silkscreen, mask and mechanical layers (free items; w line width, h text height)
Mechanical 1:
  the board outline again, w0.2

## Text inside footprints (layer, text, board x,y; h text height)
D1: Top Overlay "RefDes" at 76.911,13.635 h1.27 r180; Top Overlay "*" at 76.746,12.721 h1.27 r180; Top Overlay "REFDES" at 77.229,13.635 h1.27 r180; Mechanical 13 "RefDes2" at 77.229,13.635 h1.27 r180; Mechanical 13 "*" at 75.895,13.622 h1.27 r180
D2: Top Overlay "RefDes" at 64.897,13.635 h1.27 r180; Top Overlay "*" at 64.732,12.721 h1.27 r180; Top Overlay "REFDES" at 65.215,13.635 h1.27 r180; Mechanical 13 "*" at 63.881,13.622 h1.27 r180
D3: Top Overlay "RefDes" at 52.908,13.635 h1.27 r180; Top Overlay "*" at 52.743,12.721 h1.27 r180; Top Overlay "REFDES" at 53.226,13.635 h1.27 r180; Mechanical 13 "*" at 51.892,13.622 h1.27 r180
D4: Top Overlay "RefDes" at 40.894,13.635 h1.27 r180; Top Overlay "*" at 40.729,12.721 h1.27 r180; Top Overlay "REFDES" at 41.212,13.635 h1.27 r180; Mechanical 13 "RefDes2" at 41.212,13.635 h1.27 r180; Mechanical 13 "*" at 39.878,13.622 h1.27 r180
D5: Top Overlay "RefDes" at 16.891,13.635 h1.27 r180; Top Overlay "*" at 16.726,12.721 h1.27 r180; Top Overlay "REFDES" at 17.209,13.635 h1.27 r180; Mechanical 13 "RefDes2" at 17.209,13.635 h1.27 r180; Mechanical 13 "*" at 15.875,13.622 h1.27 r180
D6: Top Overlay "RefDes" at 28.905,13.635 h1.27 r180; Top Overlay "*" at 28.74,12.721 h1.27 r180; Top Overlay "REFDES" at 29.223,13.635 h1.27 r180; Mechanical 13 "RefDes2" at 29.223,13.635 h1.27 r180; Mechanical 13 "*" at 27.889,13.622 h1.27 r180
U3: Top Overlay "*" at 45.276,59.343 h1.27; Mechanical 13 "*" at 46.584,58.144 h1.27